# EAGLE board combined (EAGLE 8.5.2)
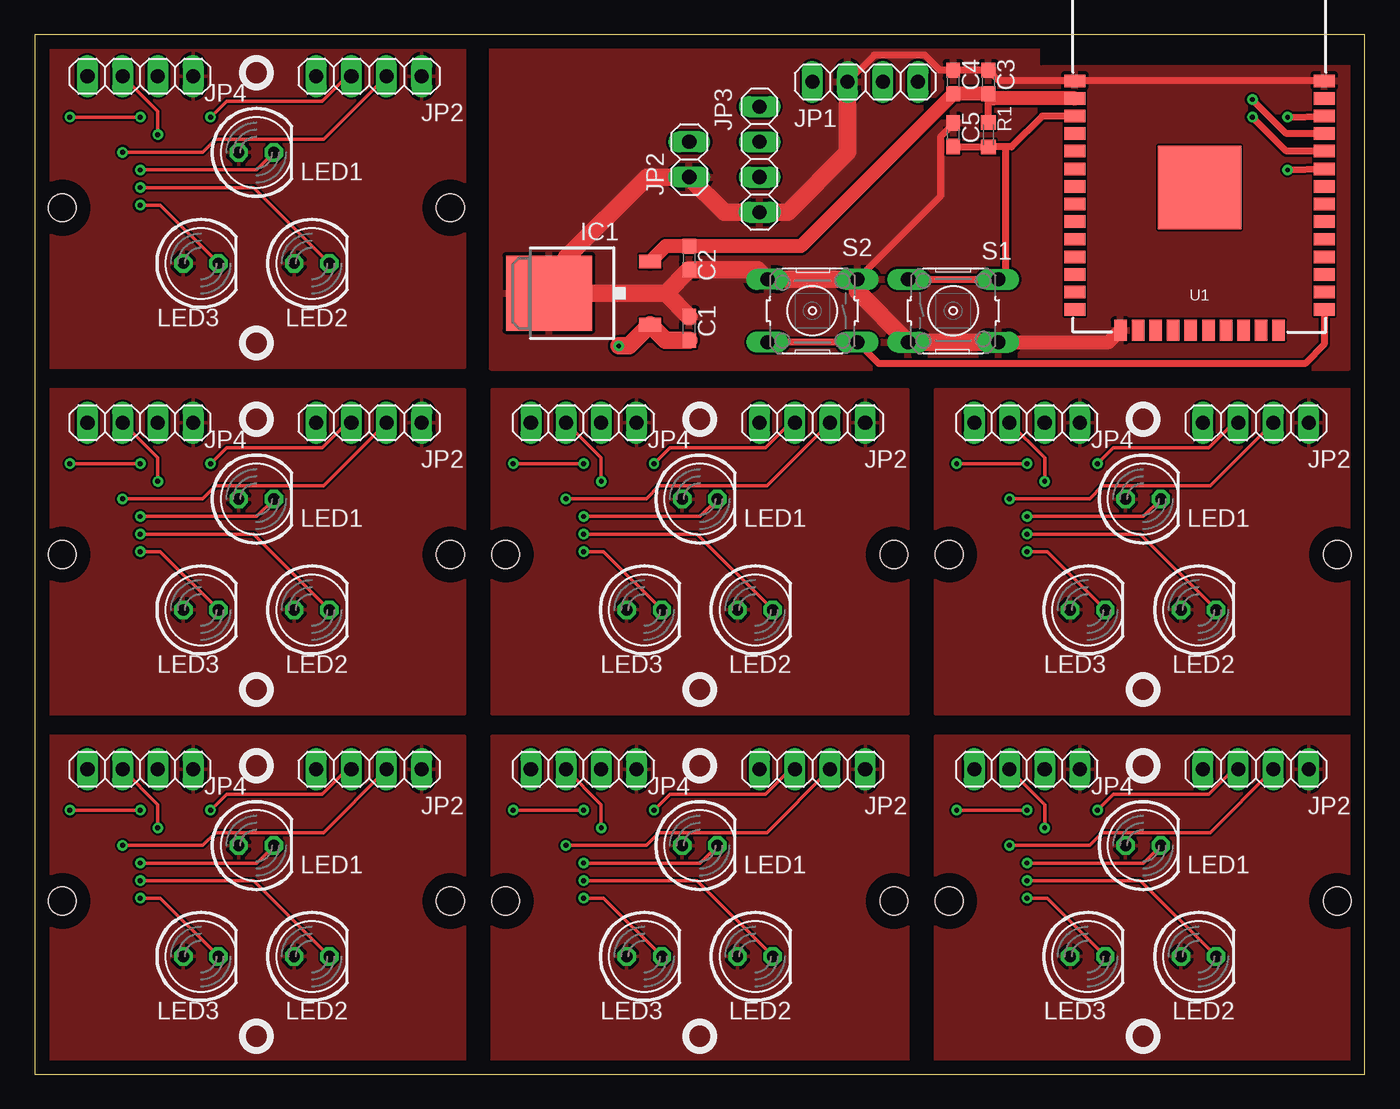
[diagram p0: board, top side]
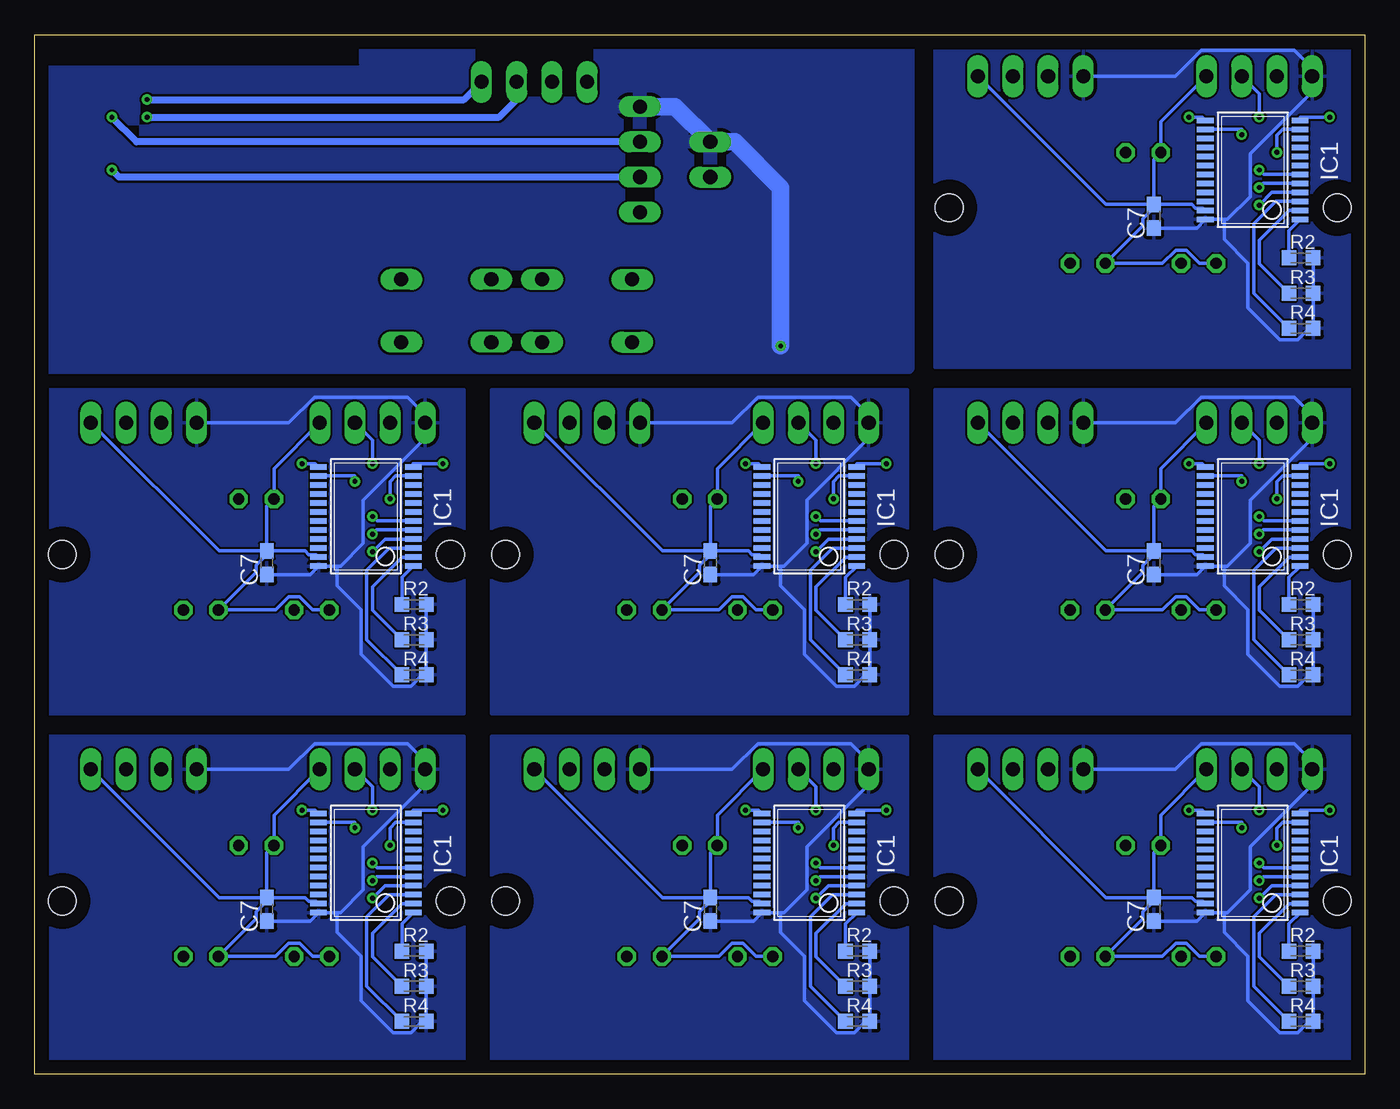
[diagram p1: board, bottom side, seen from below]

Size 96 x 75 mm. Coordinates in mm from the lower left corner, seen from the top.
Outline: 0,0 96,0 96,75 0,75 0,0
Copper layers (1*16): Top 0.035mm / dielectric 1.5mm / Bottom 0.035mm
Design rules "default": minimum track width 6mil, minimum drill 0.35mm, track to track 6mil, track to pad 6mil, pad to pad 6mil, via to via 6mil, smd to smd 6mil, copper to edge 40mil, drill to drill 6mil, minimum pad ring 10mil, minimum via ring 8mil, stop-mask expansion 4mil, vias tented up to drill 0mil, thermal gap 10mil
Holes 2 mm at 2,12.5 30,12.5 34,12.5 62,12.5 66,12.5 94,12.5 2,37.5 30,37.5 34,37.5 62,37.5 66,37.5 94,37.5 2,62.5 30,62.5

## Footprints (pad centres in the part's own frame; a part is rotated, then mirrored left to right if it is on the bottom)
C1608 = smd 1.1 x 1: 1 -0.85,0; 2 0.85,0
SSOP24 = smd 0.4 x 1.2: 1 -3.575,-3.42; 2 -2.925,-3.42; 3 -2.275,-3.42; 4 -1.625,-3.42; 5 -0.975,-3.42; 6 -0.325,-3.42; 7 0.325,-3.42; 8 0.975,-3.42; 9 1.625,-3.42; 10 2.275,-3.42; 11 2.925,-3.42; 12 3.575,-3.42; 13 3.575,3.42; 14 2.925,3.42; 15 2.275,3.42; 16 1.625,3.42; 17 0.975,3.42; 18 0.325,3.42; 19 -0.325,3.42; 20 -0.975,3.42; 21 -1.625,3.42; 22 -2.275,3.42; 23 -2.925,3.42; 24 -3.575,3.42
TO252 = smd 1 x 1.6: 1 -2.28,-4.8; 2 2.28,-4.8 | smd 5.4 x 6.2: 3 0,2.5
1X04 = drill 1.016 long: 1 -3.81,0; 2 -1.27,0; 3 1.27,0; 4 3.81,0
1X02 = drill 1.016 long: 1 -1.27,0; 2 1.27,0
LED5MM = drill 0.813 octagon: A -1.27,0; K 1.27,0
SMD1608 = smd 1.05 x 1.08: 1 -0.875,0; 2 0.875,0
B3F-10XX = drill 1.016 long: 1 -3.251,2.261; 2 3.251,2.261; 3 -3.251,-2.261; 4 3.251,-2.261
ESP-WROOM-32 = smd 0.9 x 1.5: 1 7.7,9; 2 6.43,9; 3 5.16,9; 4 3.89,9; 5 2.62,9; 6 1.35,9; 7 0.08,9; 8 -1.19,9; 9 -2.46,9; 10 -3.73,9; 11 -5,9; 12 -6.27,9; 13 -7.54,9; 14 -8.81,9; 25 -8.81,-9; 26 -7.54,-9; 27 -6.27,-9; 28 -5,-9; 29 -3.73,-9; 30 -2.46,-9; 31 -1.19,-9; 32 0.08,-9; 33 1.35,-9; 34 2.62,-9; 35 3.89,-9; 36 5.16,-9; 37 6.43,-9; 38 7.7,-9 | smd 1.5 x 0.9: 15 -10.3,5.715; 16 -10.3,4.445; 17 -10.3,3.175; 18 -10.3,1.905; 19 -10.3,0.635; 20 -10.3,-0.635; 21 -10.3,-1.905; 22 -10.3,-3.175; 23 -10.3,-4.445; 24 -10.3,-5.715 | smd 6 x 6: GND 0,0

## Placement (x,y rotation side)
C1  0.1u  [C1608]  47.24,11.9 270 bottom
C2  0.1u  [C1608]  79.24,11.9 270 bottom
C3  0.1u  [C1608]  15.24,36.9 270 bottom
C4  0.1u  [C1608]  47.24,36.9 270 bottom
C5  0.1u  [C1608]  79.24,36.9 270 bottom
C6  0.1u  [C1608]  15.24,61.9 270 bottom
C7  0.1u  [C1608]  15.24,11.9 270 bottom
C8  1u  [C1608]  47.24,53.81 90 top
C9  1u  [C1608]  47.24,58.89 270 top
C10  0.1u  [C1608]  68.83,71.59 90 top
C11  10u  [C1608]  66.29,71.59 90 top
C12  0.1u  [C1608]  66.29,67.78 90 top
IC1  MY9221SS  [SSOP24]  8.09,15.24 90 bottom
IC2  MY9221SS  [SSOP24]  40.09,15.24 90 bottom
IC3  MY9221SS  [SSOP24]  72.09,15.24 90 bottom
IC4  MY9221SS  [SSOP24]  8.09,40.24 90 bottom
IC5  MY9221SS  [SSOP24]  40.09,40.24 90 bottom
IC6  MY9221SS  [SSOP24]  72.09,40.24 90 bottom
IC7  MY9221SS  [SSOP24]  8.09,65.24 90 bottom
IC8  7805DT  [TO252]  39.62,56.35 90 top
JP1  [1X04]  56.13,22 0 top
JP2  [1X04]  24.13,22 0 top
JP3  [1X04]  39.62,22 180 top
JP4  [1X04]  7.62,22 180 top
JP5  [1X04]  88.13,22 0 top
JP6  [1X04]  71.62,22 180 top
JP7  [1X04]  24.13,47 0 top
JP8  [1X04]  7.62,47 180 top
JP9  [1X04]  56.13,47 0 top
JP10  [1X04]  39.62,47 180 top
JP11  [1X04]  88.13,47 0 top
JP12  [1X04]  71.62,47 180 top
JP13  [1X04]  24.13,72 0 top
JP14  [1X04]  7.62,72 180 top
JP15  [1X04]  59.94,71.59 0 top
JP16  [1X04]  52.32,66 270 top
JP17  [1X02]  47.24,66 90 top
LED1  [LED5MM]  16,16.5 0 top
LED2  [LED5MM]  20,8.5 0 top
LED3  [LED5MM]  12,8.5 0 top
LED4  [LED5MM]  48,16.5 0 top
LED5  [LED5MM]  52,8.5 0 top
LED6  [LED5MM]  44,8.5 0 top
LED7  [LED5MM]  80,16.5 0 top
LED8  [LED5MM]  84,8.5 0 top
LED9  [LED5MM]  76,8.5 0 top
LED10  [LED5MM]  16,41.5 0 top
LED11  [LED5MM]  20,33.5 0 top
LED12  [LED5MM]  12,33.5 0 top
LED13  [LED5MM]  48,41.5 0 top
LED14  [LED5MM]  52,33.5 0 top
LED15  [LED5MM]  44,33.5 0 top
LED16  [LED5MM]  80,41.5 0 top
LED17  [LED5MM]  84,33.5 0 top
LED18  [LED5MM]  76,33.5 0 top
LED19  [LED5MM]  16,66.5 0 top
LED20  [LED5MM]  20,58.5 0 top
LED21  [LED5MM]  12,58.5 0 top
R1  [SMD1608]  36.61,8.89 0 bottom
R2  [SMD1608]  4.61,8.89 0 bottom
R3  [SMD1608]  4.61,6.35 0 bottom
R4  [SMD1608]  4.61,3.81 0 bottom
R5  [SMD1608]  36.61,6.35 0 bottom
R6  [SMD1608]  36.61,3.81 0 bottom
R7  [SMD1608]  68.61,8.89 0 bottom
R8  [SMD1608]  68.61,6.35 0 bottom
R9  [SMD1608]  68.61,3.81 0 bottom
R10  [SMD1608]  4.61,33.89 0 bottom
R11  [SMD1608]  4.61,31.35 0 bottom
R12  [SMD1608]  4.61,28.81 0 bottom
R13  [SMD1608]  36.61,33.89 0 bottom
R14  [SMD1608]  36.61,31.35 0 bottom
R15  [SMD1608]  36.61,28.81 0 bottom
R16  [SMD1608]  68.61,33.89 0 bottom
R17  [SMD1608]  68.61,31.35 0 bottom
R18  [SMD1608]  68.61,28.81 0 bottom
R19  [SMD1608]  4.61,58.89 0 bottom
R20  [SMD1608]  4.61,56.35 0 bottom
R21  [SMD1608]  4.61,53.81 0 bottom
R22  10k  [SMD1608]  68.83,67.78 270 top
S1  [B3F-10XX]  66.29,55.08 0 top
S2  [B3F-10XX]  56.13,55.08 180 top
U1  ESP-WROOM-32  [ESP-WROOM-32]  84.07,63.97 90 top

## Library data of the parts
C1-C12 = rcl; SPICEPREFIX: C
IC1-IC7 = akizuki
IC8 = linear
JP1-JP17 = pinhead
LED1-LED21 = led
R1-R22 = generic
S1 S2 = switch-omron; MPN: B3F-1000; OC_FARNELL: 176432; OC_NEWARK: 36M3542
U1 = esp32

## Nets
+3V3: C9.1 C10.1 C11.1 IC8.2 R22.1 U1.2
+5V: C7.1 IC1.23 JP2.4 JP4.1 LED1.A LED2.A LED3.A
+5V1: C1.1 IC2.23 JP1.4 JP3.1 LED4.A LED5.A LED6.A
+5V2: C2.1 IC3.23 JP5.4 JP6.1 LED7.A LED8.A LED9.A
+5V3: C3.1 IC4.23 JP7.4 JP8.1 LED10.A LED11.A LED12.A
+5V4: C4.1 IC5.23 JP9.4 JP10.1 LED13.A LED14.A LED15.A
+5V5: C5.1 IC6.23 JP11.4 JP12.1 LED16.A LED17.A LED18.A
+5V6: C6.1 IC7.23 JP13.4 JP14.1 LED19.A LED20.A LED21.A
+5V7: C8.1 IC8.1 JP16.1 JP17.2
GND: C7.2 IC1.24 JP2.1 JP4.4 R2.2 R3.2 R4.2
GND1: C1.2 IC2.24 JP1.1 JP3.4 R1.2 R5.2 R6.2
GND2: C2.2 IC3.24 JP5.1 JP6.4 R7.2 R8.2 R9.2
GND3: C3.2 IC4.24 JP7.1 JP8.4 R10.2 R11.2 R12.2
GND4: C4.2 IC5.24 JP9.1 JP10.4 R13.2 R14.2 R15.2
GND5: C5.2 IC6.24 JP11.1 JP12.4 R16.2 R17.2 R18.2
GND6: C6.2 IC7.24 JP13.1 JP14.4 R19.2 R20.2 R21.2
GND7: C8.2 C9.2 C10.2 C11.2 C12.2 IC8.3 JP15.2 JP16.4 JP17.1 S1.3 S1.4 S2.3 S2.4 U1.1 U1.15 U1.38
N$1: IC1.11 JP2.3
N$2: IC2.11 JP1.3
N$3: IC2.13 JP1.2
N$4: IC1.13 JP2.2
N$5: IC2.12 JP3.2
N$6: IC2.14 JP3.3
N$7: IC1.12 JP4.2
N$8: IC2.1 R1.1
N$9: IC1.14 JP4.3
N$10: IC2.2 R5.1
N$11: IC2.3 R6.1
N$12: IC2.6 LED4.K
N$13: IC2.5 LED5.K
N$14: IC1.1 R2.1
N$15: IC1.2 R3.1
N$16: IC1.3 R4.1
N$17: IC1.6 LED1.K
N$18: IC1.5 LED2.K
N$19: IC1.4 LED3.K
N$20: IC2.4 LED6.K
N$21: IC3.11 JP5.3
N$22: IC3.13 JP5.2
N$23: IC3.12 JP6.2
N$24: IC3.14 JP6.3
N$25: IC3.1 R7.1
N$26: IC3.2 R8.1
N$27: IC3.3 R9.1
N$28: IC3.6 LED7.K
N$29: IC3.5 LED8.K
N$30: IC3.4 LED9.K
N$31: IC4.11 JP7.3
N$32: IC4.13 JP7.2
N$33: IC4.12 JP8.2
N$34: IC4.14 JP8.3
N$35: IC4.1 R10.1
N$36: IC4.2 R11.1
N$37: IC4.3 R12.1
N$38: IC4.6 LED10.K
N$39: IC4.5 LED11.K
N$40: IC4.4 LED12.K
N$41: IC5.11 JP9.3
N$42: IC5.13 JP9.2
N$43: IC5.12 JP10.2
N$44: IC5.14 JP10.3
N$45: IC5.1 R13.1
N$46: IC5.2 R14.1
N$47: IC5.3 R15.1
N$48: IC5.6 LED13.K
N$49: IC5.5 LED14.K
N$50: IC5.4 LED15.K
N$51: IC6.11 JP11.3
N$52: IC6.13 JP11.2
N$53: IC6.12 JP12.2
N$54: IC6.14 JP12.3
N$55: IC6.1 R16.1
N$56: IC6.2 R17.1
N$57: IC6.3 R18.1
N$58: IC6.6 LED16.K
N$59: IC6.5 LED17.K
N$60: IC6.4 LED18.K
N$61: IC7.11 JP13.3
N$62: IC7.13 JP13.2
N$63: IC7.12 JP14.2
N$64: IC7.14 JP14.3
N$65: IC7.1 R19.1
N$66: IC7.2 R20.1
N$67: IC7.3 R21.1
N$68: IC7.6 LED19.K
N$69: IC7.5 LED20.K
N$70: IC7.4 LED21.K
N$71: JP15.3 U1.34
N$72: JP15.4 U1.35
N$73: S2.1 S2.2 U1.25
N$74: C12.1 R22.2 S1.1 S1.2 U1.3
N$75: JP16.2 U1.36
N$76: JP16.3 U1.33

## Tracks (layer width: path | path; a pad name or v marks a point on that pad's centre or on a via)
+3V3
  Top 0.508: R22.1 C10.1
  Top 1.016: U1.2 69.17,70.4 C10.1 C11.1 55.29,59.74 C9.1 45.53,59.74 IC8.2
+5V
  Bottom 0.254: JP4.1 14.73,18.7 LED1.A 15.24,15.99 C7.1 | LED3.A 11.94,8.5 12.88,9.44 13.66,9.44 14.6,8.5 LED2.A 16.02,11.21 16.02,11.72 15.24,12.49 C7.1 | IC1.23 11.68,12.49 12.23,12.49 12.49,12.75 C7.1 | JP2.4 18.69,12.75 C7.1
  pour Top: 1,1 31.02,1 31.02,24.4 1,24.4
+5V1
  Bottom 0.254: JP3.1 46.73,18.7 LED4.A 47.24,15.99 C1.1 | LED6.A 43.94,8.5 44.88,9.44 45.66,9.44 46.6,8.5 LED5.A 48.02,11.21 48.02,11.72 47.24,12.49 C1.1 | IC2.23 43.68,12.49 44.23,12.49 44.49,12.75 C1.1 | JP1.4 50.69,12.75 C1.1
  pour Top: 33,1 63.02,1 63.02,24.4 33,24.4
+5V2
  Bottom 0.254: JP6.1 78.73,18.7 LED7.A 79.24,15.99 C2.1 | LED9.A 75.94,8.5 76.88,9.44 77.66,9.44 78.6,8.5 LED8.A 80.02,11.21 80.02,11.72 79.24,12.49 C2.1 | IC3.23 75.68,12.49 76.23,12.49 76.49,12.75 C2.1 | JP5.4 82.69,12.75 C2.1
  pour Top: 65,1 95.02,1 95.02,24.4 65,24.4
+5V3
  Bottom 0.254: JP8.1 14.73,43.7 LED10.A 15.24,40.99 C3.1 | LED12.A 11.94,33.5 12.88,34.44 13.66,34.44 14.6,33.5 LED11.A 16.02,36.21 16.02,36.72 15.24,37.49 C3.1 | IC4.23 11.68,37.49 12.23,37.49 12.49,37.75 C3.1 | JP7.4 18.69,37.75 C3.1
  pour Top: 1,26 31.02,26 31.02,49.4 1,49.4
+5V4
  Bottom 0.254: JP10.1 46.73,43.7 LED13.A 47.24,40.99 C4.1 | LED15.A 43.94,33.5 44.88,34.44 45.66,34.44 46.6,33.5 LED14.A 48.02,36.21 48.02,36.72 47.24,37.49 C4.1 | IC5.23 43.68,37.49 44.23,37.49 44.49,37.75 C4.1 | JP9.4 50.69,37.75 C4.1
  pour Top: 33,26 63.02,26 63.02,49.4 33,49.4
+5V5
  Bottom 0.254: JP12.1 78.73,43.7 LED16.A 79.24,40.99 C5.1 | LED18.A 75.94,33.5 76.88,34.44 77.66,34.44 78.6,33.5 LED17.A 80.02,36.21 80.02,36.72 79.24,37.49 C5.1 | IC6.23 75.68,37.49 76.23,37.49 76.49,37.75 C5.1 | JP11.4 82.69,37.75 C5.1
  pour Top: 65,26 95.02,26 95.02,49.4 65,49.4
+5V6
  Bottom 0.254: JP14.1 14.73,68.7 LED19.A 15.24,65.99 C6.1 | LED21.A 11.94,58.5 12.88,59.44 13.66,59.44 14.6,58.5 LED20.A 16.02,61.21 16.02,61.72 15.24,62.49 C6.1 | IC7.23 11.68,62.49 12.23,62.49 12.49,62.75 C6.1 | JP13.4 18.69,62.75 C6.1
  pour Top: 1,51 31.02,51 31.02,74.4 1,74.4
+5V7  (via drill 0.35)
  Top 1.27: v42.16,52.54 42.89,52.54 IC8.1 45.53,52.96 C8.1
  Bottom 1.27: v42.16,52.54 42.16,63.97 45.46,67.27 JP17.2 49.78,69.81 JP16.1
  pour Bottom: 33,51 94.77,51 94.77,74.4 33,74.4
GND
  Bottom 0.254: R2.2 R3.2 R4.2 4.03,3.81 4.84,2.99 6.13,2.99 8.43,5.3 8.43,8.51 10.16,10.23 10.16,11.66 | 10.16,11.66 9.93,11.66 8.28,13.31 8.28,16.4 3.81,20.87 JP4.4 3.81,22.59 5.08,23.86 11.81,23.86 13.66,22 JP2.1 | 10.16,11.66 IC1.24 12.12,11.05 C7.2
  pour Bottom: 1,1 31.02,1 31.02,24.4 1,24.4
GND1
  Bottom 0.254: R1.2 R5.2 R6.2 36.02,3.81 36.84,2.99 38.13,2.99 40.43,5.3 40.43,8.51 42.16,10.23 42.16,11.66 | 42.16,11.66 41.92,11.66 40.28,13.31 40.28,16.4 35.81,20.87 JP3.4 35.81,22.59 37.08,23.86 43.81,23.86 45.66,22 JP1.1 | 42.16,11.66 IC2.24 44.12,11.05 C1.2
  pour Bottom: 33,1 63.02,1 63.02,24.4 33,24.4
GND2
  Bottom 0.254: R7.2 R8.2 R9.2 68.03,3.81 68.84,2.99 70.13,2.99 72.43,5.3 72.43,8.51 74.16,10.23 74.16,11.66 | 74.16,11.66 73.92,11.66 72.28,13.31 72.28,16.4 67.81,20.87 JP6.4 67.81,22.59 69.08,23.86 75.81,23.86 77.67,22 JP5.1 | 74.16,11.66 IC3.24 76.12,11.05 C2.2
  pour Bottom: 65,1 95.02,1 95.02,24.4 65,24.4
GND3
  Bottom 0.254: R10.2 R11.2 R12.2 4.03,28.81 4.84,27.99 6.13,27.99 8.43,30.3 8.43,33.51 10.16,35.23 10.16,36.66 | 10.16,36.66 9.93,36.66 8.28,38.31 8.28,41.4 3.81,45.87 JP8.4 3.81,47.59 5.08,48.86 11.81,48.86 13.66,47 JP7.1 | 10.16,36.66 IC4.24 12.12,36.05 C3.2
  pour Bottom: 1,26 31.02,26 31.02,49.4 1,49.4
GND4
  Bottom 0.254: R13.2 R14.2 R15.2 36.02,28.81 36.84,27.99 38.13,27.99 40.43,30.3 40.43,33.51 42.16,35.23 42.16,36.66 | 42.16,36.66 41.92,36.66 40.28,38.31 40.28,41.4 35.81,45.87 JP10.4 35.81,47.59 37.08,48.86 43.81,48.86 45.66,47 JP9.1 | 42.16,36.66 IC5.24 44.12,36.05 C4.2
  pour Bottom: 33,26 63.02,26 63.02,49.4 33,49.4
GND5
  Bottom 0.254: R16.2 R17.2 R18.2 68.03,28.81 68.84,27.99 70.13,27.99 72.43,30.3 72.43,33.51 74.16,35.23 74.16,36.66 | 74.16,36.66 73.92,36.66 72.28,38.31 72.28,41.4 67.81,45.87 JP12.4 67.81,47.59 69.08,48.86 75.81,48.86 77.67,47 JP11.1 | 74.16,36.66 IC6.24 76.12,36.05 C5.2
  pour Bottom: 65,26 95.02,26 95.02,49.4 65,49.4
GND6
  Bottom 0.254: R19.2 R20.2 R21.2 4.03,53.81 4.84,52.99 6.13,52.99 8.43,55.3 8.43,58.51 10.16,60.23 10.16,61.66 | 10.16,61.66 9.93,61.66 8.28,63.31 8.28,66.4 3.81,70.87 JP14.4 3.81,72.59 5.08,73.86 11.81,73.86 13.66,72 JP13.1 | 10.16,61.66 IC7.24 12.12,61.05 C6.2
  pour Bottom: 1,51 31.02,51 31.02,74.4 1,74.4
GND7
  Top 0.508: U1.38 U1.1 69.6,71.67 C10.2 C11.2 65.31,72.44 64.23,73.52 60.6,73.52 JP15.2 | C12.2 66.29,68.56 65.38,67.65 65.38,63.34 S2.3
  Top 1.016: S1.4 77.5,52.82 U1.15
  Top 1.27: IC8.3 38.35,56.35 | 38.35,56.35 45.55,56.35 | 45.55,56.35 C9.2 52.18,58.04 S2.4 S2.3 59.38,56.48 S1.3 S1.4 | JP15.2 58.67,66.51 54.35,62.19 JP16.4 49.78,62.19 JP17.1 44.19,64.73 38.35,58.89 38.35,56.35 | 45.55,56.35 C8.2
  pour Top: 33,51 94.77,51 94.77,74.4 33,74.4
N$1  (via drill 0.35)
  Top 0.254: v6.35,16.51 12.14,16.51 13.07,17.44 20.84,17.44 JP2.3
  Bottom 0.254: v6.35,16.51 6.35,17.75 5.94,18.16 IC1.11
N$2  (via drill 0.35)
  Top 0.254: v38.35,16.51 44.14,16.51 45.07,17.44 52.84,17.44 JP1.3
  Bottom 0.254: v38.35,16.51 38.35,17.75 37.94,18.16 IC2.11
N$3  (via drill 0.35)
  Top 0.254: JP1.2 54.55,22 52.75,20.2 45.85,20.2 v44.7,19.05
  Bottom 0.254: v44.7,19.05 43.74,19.05 IC2.13
N$4  (via drill 0.35)
  Top 0.254: JP2.2 22.55,22 20.75,20.2 13.85,20.2 v12.7,19.05
  Bottom 0.254: v12.7,19.05 11.74,19.05 IC1.13
N$5  (via drill 0.35)
  Top 0.254: v34.54,19.05 v39.62,19.05
  Bottom 0.254: IC2.12 36.67,19.05 v34.54,19.05 | v39.62,19.05 39.62,20.73 JP3.2
N$6  (via drill 0.35)
  Top 0.254: JP3.3 40.89,19.46 v40.89,17.78
  Bottom 0.254: IC2.14 40.89,18.16 v40.89,17.78
N$7  (via drill 0.35)
  Top 0.254: v2.54,19.05 v7.62,19.05
  Bottom 0.254: IC1.12 4.67,19.05 v2.54,19.05 | v7.62,19.05 7.62,20.73 JP4.2
N$8
  Bottom 0.254: R1.1 37.48,10.85 IC2.1
N$9  (via drill 0.35)
  Top 0.254: JP4.3 8.89,19.46 v8.89,17.78
  Bottom 0.254: IC1.14 8.89,18.16 v8.89,17.78
N$10
  Bottom 0.254: R5.1 39.62,8.48 39.62,10.16 37.47,12.31 IC2.2
N$11
  Bottom 0.254: R6.1 40.03,6.35 40.03,11.36 38.42,12.96 IC2.3
N$12  (via drill 0.35)
  Top 0.254: LED4.K 48.01,15.24 v39.62,15.24
  Bottom 0.254: v39.62,15.24 39.3,14.91 IC2.6
N$13  (via drill 0.35)
  Top 0.254: LED5.K 47.8,13.97 v39.62,13.97
  Bottom 0.254: v39.62,13.97 39.33,14.27 IC2.5
N$14
  Bottom 0.254: R2.1 5.49,10.85 IC1.1
N$15
  Bottom 0.254: R3.1 7.62,8.48 7.62,10.16 5.46,12.31 IC1.2
N$16
  Bottom 0.254: R4.1 8.03,6.35 8.03,11.36 6.42,12.96 IC1.3
N$17  (via drill 0.35)
  Top 0.254: LED1.K 16.01,15.24 v7.62,15.24
  Bottom 0.254: v7.62,15.24 7.29,14.91 IC1.6
N$18  (via drill 0.35)
  Top 0.254: LED2.K 15.8,13.97 v7.62,13.97
  Bottom 0.254: v7.62,13.97 7.33,14.27 IC1.5
N$19  (via drill 0.35)
  Top 0.254: LED3.K 9.07,12.7 v7.62,12.7
  Bottom 0.254: IC1.4 6.71,13.62 v7.62,12.7
N$20  (via drill 0.35)
  Top 0.254: LED6.K 41.07,12.7 v39.62,12.7
  Bottom 0.254: IC2.4 38.7,13.62 v39.62,12.7
N$21  (via drill 0.35)
  Top 0.254: v70.35,16.51 76.14,16.51 77.07,17.44 84.84,17.44 JP5.3
  Bottom 0.254: v70.35,16.51 70.35,17.75 69.94,18.16 IC3.11
N$22  (via drill 0.35)
  Top 0.254: JP5.2 86.56,22 84.75,20.2 77.85,20.2 v76.7,19.05
  Bottom 0.254: v76.7,19.05 75.75,19.05 IC3.13
N$23  (via drill 0.35)
  Top 0.254: v66.54,19.05 v71.62,19.05
  Bottom 0.254: IC3.12 68.67,19.05 v66.54,19.05 | v71.62,19.05 71.62,20.73 JP6.2
N$24  (via drill 0.35)
  Top 0.254: JP6.3 72.89,19.46 v72.89,17.78
  Bottom 0.254: IC3.14 72.89,18.16 v72.89,17.78
N$25
  Bottom 0.254: R7.1 69.48,10.85 IC3.1
N$26
  Bottom 0.254: R8.1 71.62,8.48 71.62,10.16 69.47,12.31 IC3.2
N$27
  Bottom 0.254: R9.1 72.03,6.35 72.03,11.36 70.42,12.96 IC3.3
N$28  (via drill 0.35)
  Top 0.254: LED7.K 80.01,15.24 v71.62,15.24
  Bottom 0.254: v71.62,15.24 71.3,14.91 IC3.6
N$29  (via drill 0.35)
  Top 0.254: LED8.K 79.8,13.97 v71.62,13.97
  Bottom 0.254: v71.62,13.97 71.33,14.27 IC3.5
N$30  (via drill 0.35)
  Top 0.254: LED9.K 73.07,12.7 v71.62,12.7
  Bottom 0.254: IC3.4 70.7,13.62 v71.62,12.7
N$31  (via drill 0.35)
  Top 0.254: v6.35,41.51 12.14,41.51 13.07,42.44 20.84,42.44 JP7.3
  Bottom 0.254: v6.35,41.51 6.35,42.76 5.94,43.16 IC4.11
N$32  (via drill 0.35)
  Top 0.254: JP7.2 22.55,47 20.75,45.2 13.85,45.2 v12.7,44.05
  Bottom 0.254: v12.7,44.05 11.74,44.05 IC4.13
N$33  (via drill 0.35)
  Top 0.254: v2.54,44.05 v7.62,44.05
  Bottom 0.254: IC4.12 4.67,44.05 v2.54,44.05 | v7.62,44.05 7.62,45.73 JP8.2
N$34  (via drill 0.35)
  Top 0.254: JP8.3 8.89,44.46 v8.89,42.78
  Bottom 0.254: IC4.14 8.89,43.16 v8.89,42.78
N$35
  Bottom 0.254: R10.1 5.49,35.85 IC4.1
N$36
  Bottom 0.254: R11.1 7.62,33.48 7.62,35.16 5.46,37.31 IC4.2
N$37
  Bottom 0.254: R12.1 8.03,31.35 8.03,36.36 6.42,37.97 IC4.3
N$38  (via drill 0.35)
  Top 0.254: LED10.K 16.01,40.24 v7.62,40.24
  Bottom 0.254: v7.62,40.24 7.29,39.91 IC4.6
N$39  (via drill 0.35)
  Top 0.254: LED11.K 15.8,38.97 v7.62,38.97
  Bottom 0.254: v7.62,38.97 7.33,39.27 IC4.5
N$40  (via drill 0.35)
  Top 0.254: LED12.K 9.07,37.7 v7.62,37.7
  Bottom 0.254: IC4.4 6.71,38.62 v7.62,37.7
N$41  (via drill 0.35)
  Top 0.254: v38.35,41.51 44.14,41.51 45.07,42.44 52.84,42.44 JP9.3
  Bottom 0.254: v38.35,41.51 38.35,42.76 37.94,43.16 IC5.11
N$42  (via drill 0.35)
  Top 0.254: JP9.2 54.55,47 52.75,45.2 45.85,45.2 v44.7,44.05
  Bottom 0.254: v44.7,44.05 43.74,44.05 IC5.13
N$43  (via drill 0.35)
  Top 0.254: v34.54,44.05 v39.62,44.05
  Bottom 0.254: IC5.12 36.67,44.05 v34.54,44.05 | v39.62,44.05 39.62,45.73 JP10.2
N$44  (via drill 0.35)
  Top 0.254: JP10.3 40.89,44.46 v40.89,42.78
  Bottom 0.254: IC5.14 40.89,43.16 v40.89,42.78
N$45
  Bottom 0.254: R13.1 37.48,35.85 IC5.1
N$46
  Bottom 0.254: R14.1 39.62,33.48 39.62,35.16 37.47,37.31 IC5.2
N$47
  Bottom 0.254: R15.1 40.03,31.35 40.03,36.36 38.42,37.97 IC5.3
N$48  (via drill 0.35)
  Top 0.254: LED13.K 48.01,40.24 v39.62,40.24
  Bottom 0.254: v39.62,40.24 39.3,39.91 IC5.6
N$49  (via drill 0.35)
  Top 0.254: LED14.K 47.8,38.97 v39.62,38.97
  Bottom 0.254: v39.62,38.97 39.33,39.27 IC5.5
N$50  (via drill 0.35)
  Top 0.254: LED15.K 41.07,37.7 v39.62,37.7
  Bottom 0.254: IC5.4 38.7,38.62 v39.62,37.7
N$51  (via drill 0.35)
  Top 0.254: v70.35,41.51 76.14,41.51 77.07,42.44 84.84,42.44 JP11.3
  Bottom 0.254: v70.35,41.51 70.35,42.76 69.94,43.16 IC6.11
N$52  (via drill 0.35)
  Top 0.254: JP11.2 86.56,47 84.75,45.2 77.85,45.2 v76.7,44.05
  Bottom 0.254: v76.7,44.05 75.75,44.05 IC6.13
N$53  (via drill 0.35)
  Top 0.254: v66.54,44.05 v71.62,44.05
  Bottom 0.254: IC6.12 68.67,44.05 v66.54,44.05 | v71.62,44.05 71.62,45.73 JP12.2
N$54  (via drill 0.35)
  Top 0.254: JP12.3 72.89,44.46 v72.89,42.78
  Bottom 0.254: IC6.14 72.89,43.16 v72.89,42.78
N$55
  Bottom 0.254: R16.1 69.48,35.85 IC6.1
N$56
  Bottom 0.254: R17.1 71.62,33.48 71.62,35.16 69.47,37.31 IC6.2
N$57
  Bottom 0.254: R18.1 72.03,31.35 72.03,36.36 70.42,37.97 IC6.3
N$58  (via drill 0.35)
  Top 0.254: LED16.K 80.01,40.24 v71.62,40.24
  Bottom 0.254: v71.62,40.24 71.3,39.91 IC6.6
N$59  (via drill 0.35)
  Top 0.254: LED17.K 79.8,38.97 v71.62,38.97
  Bottom 0.254: v71.62,38.97 71.33,39.27 IC6.5
N$60  (via drill 0.35)
  Top 0.254: LED18.K 73.07,37.7 v71.62,37.7
  Bottom 0.254: IC6.4 70.7,38.62 v71.62,37.7
N$61  (via drill 0.35)
  Top 0.254: v6.35,66.51 12.14,66.51 13.07,67.44 20.84,67.44 JP13.3
  Bottom 0.254: v6.35,66.51 6.35,67.75 5.94,68.17 IC7.11
N$62  (via drill 0.35)
  Top 0.254: JP13.2 22.55,72 20.75,70.2 13.85,70.2 v12.7,69.05
  Bottom 0.254: v12.7,69.05 11.74,69.05 IC7.13
N$63  (via drill 0.35)
  Top 0.254: v2.54,69.05 v7.62,69.05
  Bottom 0.254: IC7.12 4.67,69.05 v2.54,69.05 | v7.62,69.05 7.62,70.73 JP14.2
N$64  (via drill 0.35)
  Top 0.254: JP14.3 8.89,69.46 v8.89,67.78
  Bottom 0.254: IC7.14 8.89,68.17 v8.89,67.78
N$65
  Bottom 0.254: R19.1 5.49,60.85 IC7.1
N$66
  Bottom 0.254: R20.1 7.62,58.48 7.62,60.16 5.46,62.31 IC7.2
N$67
  Bottom 0.254: R21.1 8.03,56.35 8.03,61.36 6.42,62.97 IC7.3
N$68  (via drill 0.35)
  Top 0.254: LED19.K 16.01,65.24 v7.62,65.24
  Bottom 0.254: v7.62,65.24 7.29,64.92 IC7.6
N$69  (via drill 0.35)
  Top 0.254: LED20.K 15.8,63.97 v7.62,63.97
  Bottom 0.254: v7.62,63.97 7.33,64.27 IC7.5
N$70  (via drill 0.35)
  Top 0.254: LED21.K 9.07,62.7 v7.62,62.7
  Bottom 0.254: IC7.4 6.71,63.62 v7.62,62.7
N$71  (via drill 0.35)
  Top 0.508: U1.34 90.34,66.59 v87.88,69.05
  Bottom 0.508: JP15.3 61.21,70.32 62.48,69.05 v87.88,69.05
N$72  (via drill 0.35)
  Top 0.508: U1.35 90.34,67.86 v87.88,70.32
  Bottom 0.508: v87.88,70.32 65.02,70.32 JP15.4
N$73
  Top 0.508: S2.2 S2.1 60.93,51.27 91.69,51.27 93.07,52.65 U1.25
N$74
  Top 0.508: C12.1 66.31,66.91 R22.2 70.1,66.91 | U1.3 72.72,69.13 70.5,66.91 70.1,66.91 | S1.1 S1.2 70.1,57.9 70.1,66.91
N$75  (via drill 0.35)
  Top 0.508: v90.42,69.05 90.45,69.05 U1.36
  Bottom 0.508: JP16.2 88.64,67.27 v90.42,69.05
N$76  (via drill 0.35)
  Top 0.508: v90.42,65.24 90.45,65.24 U1.33
  Bottom 0.508: JP16.3 67.56,64.73 89.91,64.73 v90.42,65.24

## Text on the board
_tNames: JP4 | JP3 | C4 | C3 | R1 | JP2 | JP1 | C5 | LED1 | JP2 | IC1 | C2 | S2 | S1 | U1 | LED3 | LED2 | C1 | JP4 | JP4 | JP4 | JP2 | JP2 | JP2 | LED1 | LED1 | LED1 | LED3 | LED2 | LED3 | LED2 | LED3 | LED2 | JP4 | JP4 | JP4 | JP2 | JP2 | JP2 | LED1 | LED1 | LED1 | LED3 | LED2 | LED3 | LED2 | LED3 | LED2
_bNames: IC1 | C7 | R2 | R3 | R4 | IC1 | IC1 | IC1 | C7 | C7 | C7 | R2 | R2 | R2 | R3 | R3 | R3 | R4 | R4 | R4 | IC1 | IC1 | IC1 | C7 | C7 | C7 | R2 | R2 | R2 | R3 | R3 | R3 | R4 | R4 | R4